# EAGLE board 3ch mix (EAGLE 6.3)
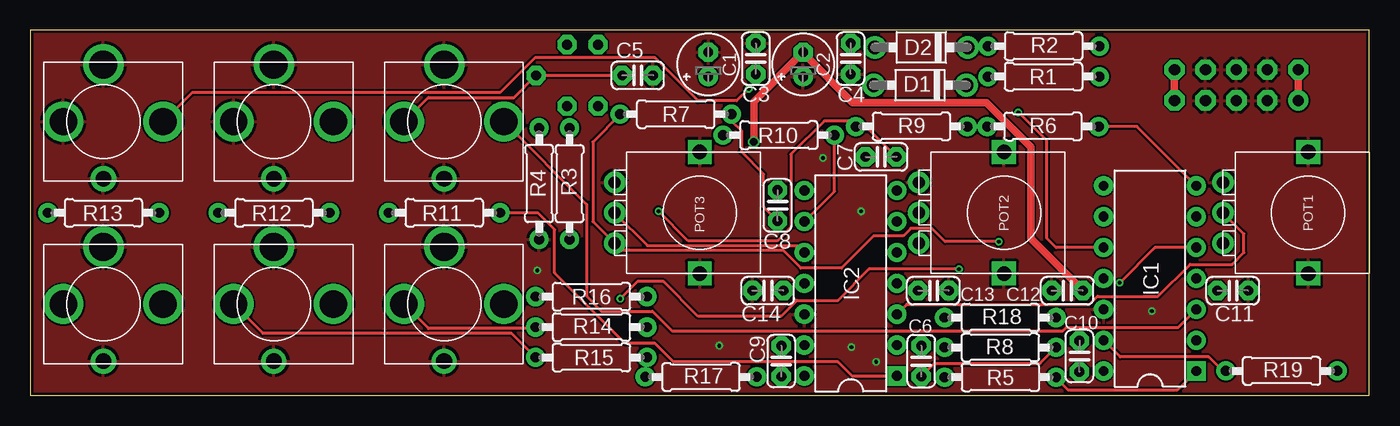
[diagram p0: board, top side]
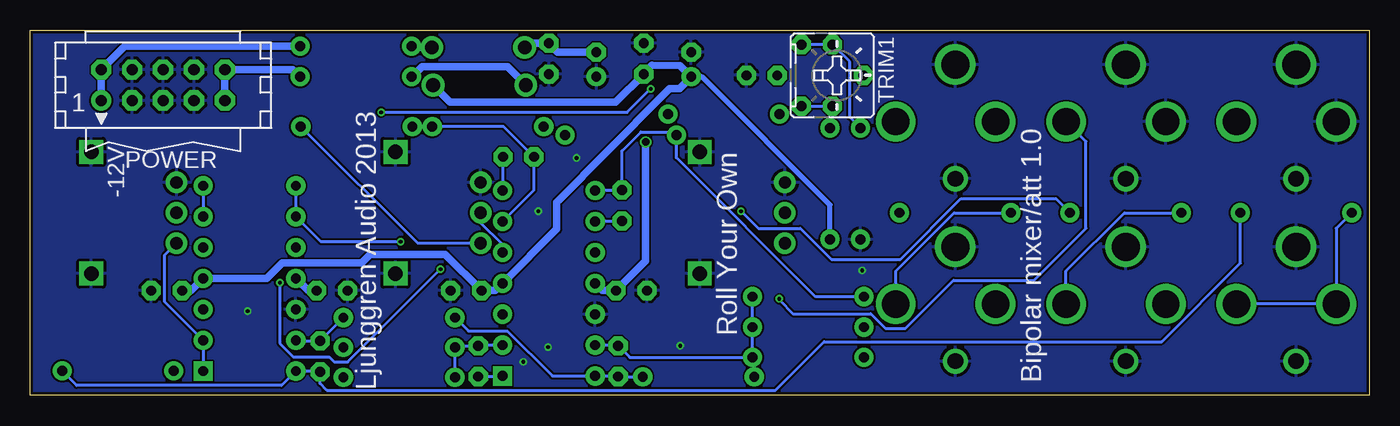
[diagram p1: board, bottom side, seen from below]

Size 110 x 30 mm. Coordinates in mm from the lower left corner, seen from the top.
Outline: 0,0 110,0 110,30 0,30 0,0
Copper layers (1*16): Top 0.035mm / dielectric 1.5mm / Bottom 0.035mm
Design rules "ITEADstudio_DRC 15mil annular ring": minimum track width 6mil, minimum drill 12mil, track to track 6mil, track to pad 6mil, pad to pad 6mil, via to via 6mil, smd to smd 0mil, copper to edge 10mil, drill to drill 10mil, minimum pad ring 15mil, minimum via ring 6mil, stop-mask expansion 2mil, vias tented up to drill 100mil, thermal gap 10mil

## Footprints (pad centres in the part's own frame; a part is rotated, then mirrored left to right if it is on the bottom)
E2-5 = drill 0.813 pad 1.27: + -1.016,0 | drill 0.813 pad 1.27 octagon: - 1.016,0
C025-024X044 = drill 0.813 octagon: 1 -1.27,0; 2 1.27,0
DO41-7 = drill 1.118: A 3.81,0; C -3.81,0
DIL14 = drill 0.813 square: 1 -7.62,-3.81 | drill 0.813: 2 -5.08,-3.81; 3 -2.54,-3.81; 4 0,-3.81; 5 2.54,-3.81; 6 5.08,-3.81; 7 7.62,-3.81; 8 7.62,3.81; 9 5.08,3.81; 10 2.54,3.81; 11 0,3.81; 12 -2.54,3.81; 13 -5.08,3.81; 14 -7.62,3.81
ERTHENVAR = drill 2.3: RING1 -4.7,0 | drill 1.3: RING2 4.7,0 | drill 2.25: SHUNT 0,-3.3; TIP 0,4.9
POT-ALPHA9 = drill 1.2 square: GND$1 -5,0; GND$2 5,0 | drill 1: LEFT -2.5,-7; MID 0,-7; RIGHT 2.5,-7
CON10L = drill 0.914: 1 5.08,1.27 | drill 0.914 octagon: 2 5.08,-1.27; 3 2.54,1.27; 4 2.54,-1.27; 5 0,1.27; 6 0,-1.27; 7 -2.54,1.27; 8 -2.54,-1.27; 9 -5.08,1.27; 10 -5.08,-1.27
0207/9 = drill 0.813: 1 -4.58,0; 2 4.58,0
B25P = drill 0.813 octagon: A -2.54,0; AA -2.54,-2.54; E 2.54,0; EE 2.54,-2.54; S 0,2.54

## Placement (x,y rotation side)
C1  10uF  [E2-5]  55.7,27.2 90 top
C2  10uF  [E2-5]  63.5,27.2 90 top
C3  100nF  [C025-024X044]  59.6,27.67 90 top
C4  100nF  [C025-024X044]  67.4,27.67 90 top
C5  100nF  [C025-024X044]  49.9,26.3 0 top
C6  47pF  [C025-024X044]  73.2,2.8 270 top
C7  47pF  [C025-024X044]  69.9,19.6 0 top
C8  47pF  [C025-024X044]  61.4,15.6 90 top
C9  22pF  [C025-024X044]  61.7,2.8 90 top
C10  47pF  [C025-024X044]  86.2,3.2 90 top
C11  100nF  [C025-024X044]  98.8,8.6 0 top
C12  100nF  [C025-024X044]  85.2,8.6 0 top
C13  100nF  [C025-024X044]  74.2,8.6 0 top
C14  100nF  [C025-024X044]  60.6,8.6 0 top
D1  SB130  [DO41-7]  73.1,25.5 180 top
D2  SB130  [DO41-7]  73.2,28.6 180 top
IC1  TL074  [DIL14]  92,9.6 90 top
IC2  TL074  [DIL14]  67.4,9.2 90 top
IN1  ERTHENVAR_3.5MM_JACK  [ERTHENVAR]  34,22.5 270 top
IN2  ERTHENVAR_3.5MM_JACK  [ERTHENVAR]  20,22.5 270 top
IN3  ERTHENVAR_3.5MM_JACK  [ERTHENVAR]  6,22.5 270 top
OUT1  ERTHENVAR_3.5MM_JACK  [ERTHENVAR]  34,7.5 270 top
OUT2  ERTHENVAR_3.5MM_JACK  [ERTHENVAR]  20,7.5 270 top
OUT3  ERTHENVAR_3.5MM_JACK  [ERTHENVAR]  6,7.5 270 top
POT1  100K  [POT-ALPHA9]  105,15 270 top
POT2  100K  [POT-ALPHA9]  80,15 270 top
POT3  100K  [POT-ALPHA9]  55,15 270 top
POWER  [CON10L]  99.1,25.5 180 bottom
R1  10R  [0207/9]  83.25,26.2 180 top
R2  10R  [0207/9]  83.25,28.7 180 top
R3  22K  [0207/9]  44.3,17.4 270 top
R4  10K  [0207/9]  41.8,17.4 90 top
R5  100K  [0207/9]  79.7,1.48 180 top
R6  100K  [0207/9]  83.2,22.1 180 top
R7  100K  [0207/9]  53.04,23.12 0 top
R8  100K  [0207/9]  79.7,3.93 0 top
R9  100K  [0207/9]  72.4,22.1 180 top
R10  100K  [0207/9]  61.5,21.39 180 top
R11  1K  [0207/9]  34,15 180 top
R12  1K  [0207/9]  20,15 180 top
R13  1K  [0207/9]  6,15 180 top
R14  220K  [0207/9]  46.1,5.6 0 top
R15  220K  [0207/9]  46.1,3.1 0 top
R16  220K  [0207/9]  46.1,8.1 0 top
R17  220K  [0207/9]  55.1,1.5 0 top
R18  100K  [0207/9]  79.7,6.37 0 top
R19  100K  [0207/9]  102.81,2 0 top
TRIM1  25K  [B25P]  44.1,26.3 270 bottom

## Library data of the parts
C1-C14 D1 D2 IC1 IC2 IN1-IN3 OUT1-OUT3 POT1-POT3 R1-R19 TRIM1 = Roll Your Own
POWER = Roll Your Own; OC_FARNELL: unknown; OC_NEWARK: unknown

## Nets
0V: C1.- C2.+ C3.2 C4.1 C5.2 C11.2 C12.1 C13.2 C14.1 IC1.12 IC2.12 IN1.RING1 IN1.RING2 IN2.RING1 IN2.RING2 IN2.SHUNT IN3.RING1 IN3.RING2 IN3.SHUNT OUT1.RING1 OUT1.RING2 OUT2.RING1 OUT2.RING2 OUT3.RING1 OUT3.RING2 POT1.GND$1 POT1.GND$2 POT1.LEFT POT2.GND$1 POT2.GND$2 POT2.LEFT POT3.GND$1 POT3.GND$2 POT3.LEFT POWER.3 POWER.4 POWER.5 POWER.6 POWER.7 POWER.8 R4.1
+12V: C1.+ C3.1 C11.1 C13.1 D1.C IC1.4 IC2.4 R3.2
-12V: C2.- C4.2 C12.2 C14.2 D2.A IC1.11 IC2.11
N$1: POWER.9 POWER.10 R1.1
N$2: POWER.1 POWER.2 R2.1
N$4: R4.2 TRIM1.A TRIM1.AA
N$5: D1.A R1.2
N$6: D2.C R2.2
N$7: R3.1 TRIM1.E TRIM1.EE
N$8: C5.1 IN1.SHUNT TRIM1.S
N$9: IC1.3 IN1.TIP
N$10: IC1.5 IN2.TIP
N$11: IC1.10 IN3.TIP
N$12: IC1.1 IC1.2 POT1.RIGHT R5.1
N$13: IC1.6 IC1.7 POT2.RIGHT R6.1
N$14: IC1.8 IC1.9 POT3.RIGHT R7.1
N$15: C6.1 IC2.2 R5.2 R8.1
N$16: IC2.3 POT1.MID
N$17: IC2.5 POT2.MID
N$18: IC2.10 POT3.MID
N$19: OUT1.TIP R11.2
N$20: OUT2.TIP R12.2
N$21: C7.1 IC2.6 R6.2 R9.1
N$22: C8.1 IC2.9 R7.2 R10.1
N$23: C6.2 IC2.1 R8.2 R11.1
N$24: C7.2 IC2.7 R9.2 R12.1
N$25: C8.2 IC2.8 R10.2 R16.1
N$26: OUT1.SHUNT R14.1
N$27: OUT2.SHUNT R15.1
N$28: C9.2 IC2.13 R14.2 R15.2 R16.2 R17.1
N$29: C9.1 IC2.14 R17.2 R18.1
N$30: C10.2 IC1.13 R18.2 R19.1
N$31: C10.1 IC1.14 R13.1 R19.2
N$32: OUT3.SHUNT OUT3.TIP R13.2

## Tracks (layer width: path | path; a pad name or v marks a point on that pad's centre or on a via)
0V  (via drill 0.3)
  other vias: 92.15,6.91 68.28,15.14 41.66,10.26 67.46,3.96 65.13,19.51 56.59,4.06 69.49,2.74
  pour Bottom: 0.1,30.07 110.03,30.07 110.03,0 0,0 0,30.07
  pour Top: 0.1,30.07 110.03,30.07 110.03,0 -0.1,0 -0.1,30.07 -0.1,30.18
+12V
  Bottom 0.406: R3.2 44.3,15.65 54.84,26.18 C1.+
  Bottom 0.61: C11.1 96.81,8.6 IC1.4 90.58,9.6 89.31,10.87 82.8,10.87 82.09,11.58 75.91,11.58 C13.1 71.81,8.6 IC2.4 66.75,13.66 66.75,15.85 58.12,24.59 57.48,25.22 56.67,25.22 C1.+ 56.61,27.12 58.93,27.13 59.6,26.45 C3.1 61.91,24.1 75.51,24.1 D1.C
-12V  (via drill 0.61)
  Top 0.61: C12.2 82.19,12.88 82.19,20.42 78.54,24.08 67.56,24.08 63.6,28.04 C2.- 59.44,24.15 v59.44,20.83
  Bottom 0.61: D2.A 69.05,28.95 C4.2 66.67,28.22 C2.- | IC1.11 87.19,8.6 C12.2 | v59.44,20.83 59.44,11.03 C14.2 62.99,8.6 IC2.11
N$1
  Top 0.61: POWER.9 94,24.23 94,26.2
  Bottom 0.61: POWER.9 POWER.10 88.45,26.77 R1.1
N$2
  Top 0.61: POWER.1 104.2,24.23 104.2,26.3
  Bottom 0.61: POWER.1 POWER.2 102.25,28.7 R2.1
N$4
  Bottom 0.254: R4.2 42.67,22.85 42.67,27.41 TRIM1.A TRIM1.AA
N$5
  Bottom 0.61: R1.2 77.82,27 70.79,27 D1.A
N$6
  Bottom 0.61: R2.2 78.52,28.6 D2.C
N$7
  Bottom 0.254: TRIM1.EE TRIM1.E 44.1,22.18 R3.1
N$8
  Top 0.254: IN1.SHUNT 32.69,24.49 39.75,24.49 TRIM1.S C5.1
N$9
  Top 0.254: IN1.TIP 45.7,15.7 45.7,8.15 46.94,6.91 51.1,6.91 52.73,5.28 84.84,5.28 85.14,5.59 94.34,5.59 IC1.3
N$10  (via drill 0.3)
  Top 0.254: IC1.5 92.4,12.14 v89.51,9.25 | v48.46,7.92 49.89,9.35 52.02,9.35 54.87,6.49 61.66,6.49 62.98,7.81 66.37,7.81 68.92,10.36 v76.3,10.36
  Bottom 0.254: v89.51,9.25 89.51,4.27 88.39,3.15 85.45,3.15 85.04,2.74 83.92,2.74 v76.3,10.36 | v48.46,7.92 48.46,7.82 47.35,6.71 40.95,6.71 39.73,5.49 38.1,5.49 34.14,9.45 27.53,9.45 23.27,13.72 23.27,20.87 IN2.TIP
N$11  (via drill 0.3)
  Top 0.254: IC1.10 84.28,12.14 83.52,12.9 83.52,20.93 v81.18,23.27 | v59.03,25.2 58.04,24.21 54.84,24.21 51.31,27.74 41.45,27.74 38.61,24.89 13.29,24.89 IN3.TIP
  Bottom 0.254: v81.18,23.27 60.96,23.27 v59.03,25.2
N$12
  Top 0.254: IC1.1 94.24,0.41 85.27,0.41 R5.1
  Bottom 0.254: IC1.1 IC1.2 98.96,7.67 98.96,11.54 POT1.RIGHT
N$13
  Top 0.254: IC1.7 90.93,22.1 R6.1
  Bottom 0.254: IC1.7 IC1.6 | R6.1 78.18,12.5 POT2.RIGHT
N$14  (via drill 0.3)
  Top 0.254: R7.1 48.45,23.05 46.23,20.83 46.22,14.28 POT3.RIGHT 48.61,11.89 61.87,11.89 63.3,10.46 66.65,10.46 69.29,13.11 71.73,13.11 72.34,13.72 74.07,13.72 75.16,12.62 v79.58,12.62
  Bottom 0.254: IC1.8 IC1.9 86.13,12.62 v79.58,12.62
N$15
  Bottom 0.254: R5.2 R8.1 74.95,4.07 C6.1 73.15,4.12 IC2.2
N$16
  Top 0.254: IC2.3 72.02,7.47 87.02,7.47 87.68,8.13 92.66,8.13 95.3,10.77 98.75,10.77 99.72,11.73 99.72,13.27 POT1.MID
N$17
  Bottom 0.254: IC2.5 71.21,12.38 73,14.17 POT2.MID
N$18
  Top 0.254: POT3.MID 50.7,12.29 63.04,12.29 IC2.10
N$19
  Bottom 0.254: OUT1.TIP 38.9,10.2 34.1,15 R11.2
N$20
  Bottom 0.254: OUT2.TIP 24.9,10.2 20.1,15 R12.2
N$21
  Bottom 0.254: R6.2 R9.1 71.13,22.1 C7.1 68.63,16.86 IC2.6
N$22
  Top 0.254: IC2.9 66.08,16.77 R10.1 | C8.1 60.25,15.48 60.25,18.19 58.42,20.02 58.42,21.74 57.61,22.55 57.77,22.96 R7.2
  Bottom 0.254: IC2.9 63.54,14.33 C8.1
N$23
  Top 0.254: C6.2 74.27,2.6 82.96,2.6 R8.2 | R11.1 38.99,14.96 41.73,14.96 43.08,13.61 43.08,10.06 48.87,4.27 51.31,4.27 52.83,2.74 66.34,2.74 67.51,1.58 IC2.1
  Bottom 0.254: IC2.1 71.26,1.53 C6.2
N$24  (via drill 0.3)
  Top 0.254: C7.2 68.67,22.1 R9.2 67.57,22.55 65.23,22.55 62.48,19.81 62.48,13.82 61.37,12.7 54.05,12.7 v51.61,15.14
  Bottom 0.254: IC2.7 71.17,16.86 C7.2 | v51.61,15.14 50.19,13.72 46.74,13.72 44.2,11.18 38.51,11.18 33.53,16.15 25.73,16.15 R12.1
N$25
  Bottom 0.254: IC2.8 61.65,16.82 C8.2 61.4,20.09 59.84,21.64 57.27,21.64 R10.2 56.92,19.53 45.49,8.1 R16.1
N$26
  Top 0.254: R14.1 41.41,5.49 32.71,5.49 OUT1.SHUNT
N$27
  Top 0.254: R15.1 39.54,5.08 19.12,5.08 OUT2.SHUNT
N$28
  Bottom 0.254: IC2.13 61.75,4.12 C9.2 60.73,3.1 R15.2 | R17.1 50.52,2.94 R15.2 | R15.2 R14.2 R16.2
N$29
  Bottom 0.254: R17.2 59.71,1.53 C9.1 61.75,1.58 IC2.14 67.11,1.58 70.81,5.28 74,5.28 74.92,6.2 R18.1
N$30
  Top 0.254: R19.1 98.25,1.99 97.84,2.13 96.83,3.15 89.56,3.15 IC1.13
  Bottom 0.254: IC1.13 88.14,4.47 C10.2 86.2,4.5 R18.2
N$31
  Bottom 0.254: R19.2 106.21,0.81 89.36,0.81 IC1.14 86.25,1.98 C10.1 86.2,0.96 85.65,0.41 48.77,0.41 44.78,4.4 17.04,4.4 10.58,10.86 R13.1
N$32
  Bottom 0.254: R13.2 2.7,13.72 OUT3.SHUNT OUT3.TIP

## Text on the board
bPlace: -12V | Roll Your Own | Bipolar mixer/att 1.0 | Ljunggren Audio 2013